# Altium PCB nema17-knockout.PcbDoc (part 3 of 3)
Units mm, origin at the board's own origin, x right, y up, seen from the top; angles counter-clockwise.
Board outline 42.3 x 42.32 mm, 2 copper layers (Top, Bottom), stack 0 mm thick; 130 components, 82 nets, 394 pads, 273 vias.
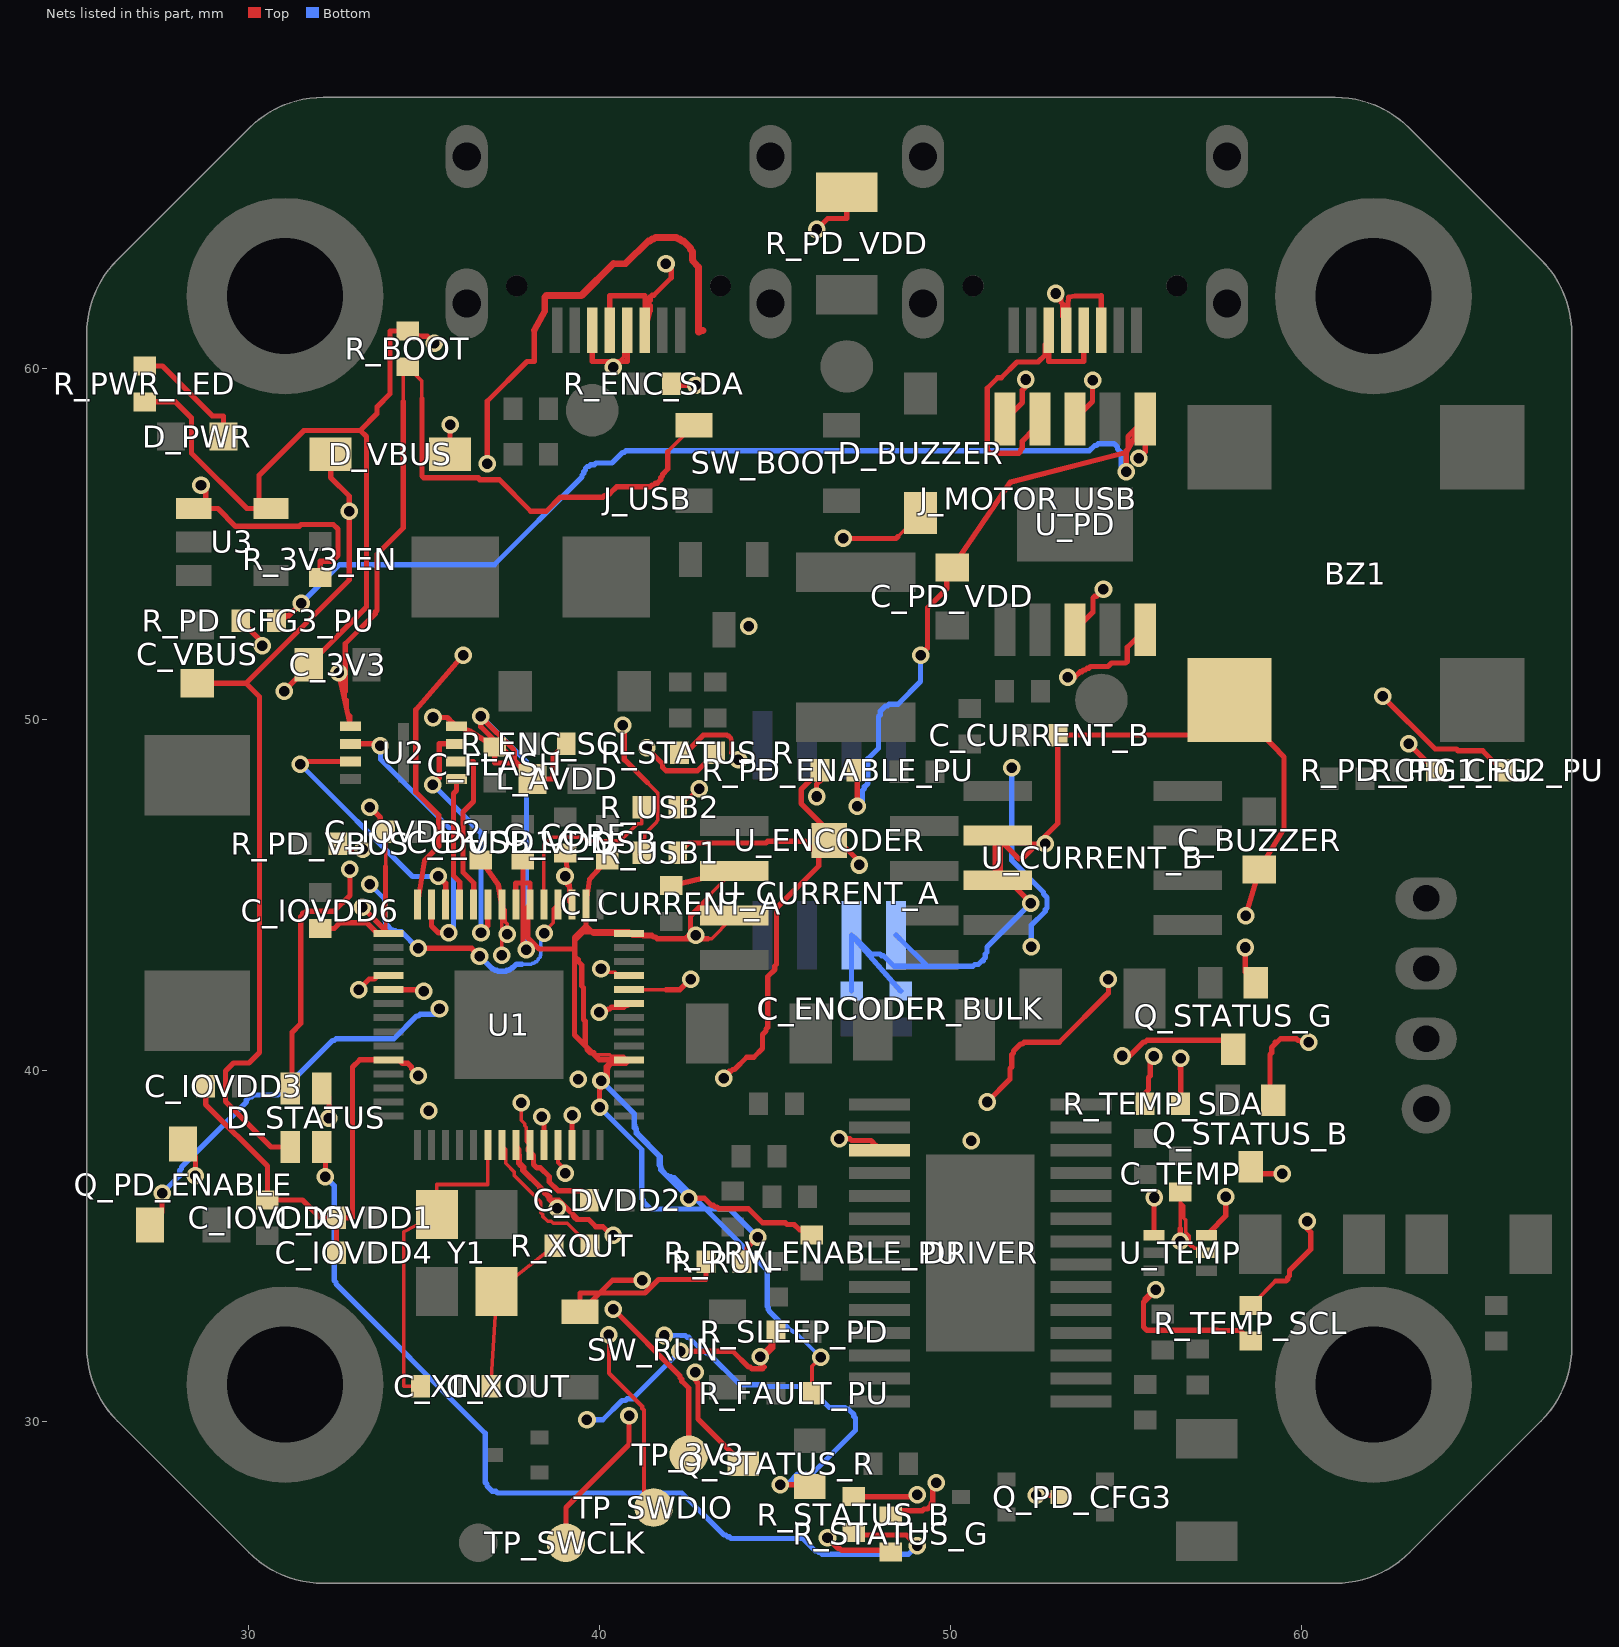
[diagram p3: the nets of this part, all layers, seen from the top]

## Via types
v1: diameter 0.5, hole 0.3, Top to Bottom, 267 vias
v2: diameter 0.45, hole 0.3, Top to Bottom, 6 vias

## Nets (pads, with @x,y where several pads share a name; then routed paths per layer and width w, separated by ;. In a path a pad name is that pad's centre, name@x,y a point inside that pad or via, vN(x,y) a via of type N, cw(c..) or ccw(c..) an arc to the next point about the centre after c; other vN are vias at no path point) (continued)
PD_CFG3_OUTPUT: Q_PD_CFG3.3 R_PD_CFG3_PU.1 U_PD.3 | length 85.6
  Top w0.15: R_PD_CFG3_PU.1@29.79,52.81 29.9,52.71 30.4,52.21 v1(30.4,52.11) ; U_PD.3@53.55,58.56 53.65,58.66 54.05,59.06 54.05,59.41 v1(54.05,59.66) ; Q_PD_CFG3.3@53.05,27.91 Q_PD_CFG3.3@53.1,27.86 Q_PD_CFG3.3@53.05,27.91 ; Q_PD_CFG3.3@53.05,27.91 v1(52.45,27.91) Q_PD_CFG3.3@53.05,27.91
  Mid1 w0.15: v1(35.15,38.86) 37,37.01 37,36.76 37.05,36.71 37.05,36.66 37.2,36.51 37.2,29.31 37.25,29.26 37.25,29.21 37.35,29.11 37.4,29.11 37.45,29.06 37.85,29.06 37.9,29.11 37.95,29.11 38.1,29.26 49.25,29.26 50.5,28.01 50.55,28.01 50.6,27.96 52.4,27.96 v1(52.45,27.91)
  Mid2 w0.135: 52.65,28.06 52.7,28.11 52.8,28.11
  Mid2 w0.15: v1(30.4,52.11) 31.75,50.76 31.75,49.76 31.8,49.71 31.8,49.66 32.45,49.01 32.45,45.56 32.55,45.46 32.55,45.41 32.8,45.16 32.8,44.46 32.85,44.41 32.85,44.36 33.7,43.51 33.7,40.71 33.75,40.66 33.75,40.61 34.4,39.96 34.4,39.66 34.45,39.61 34.45,39.56 v1(35.15,38.86) ; v1(52.45,27.91) 52.6,28.06 52.65,28.06 ; 52.8,28.11 52.85,28.16 52.9,28.16 53,28.26 53,28.36 53.45,28.81 53.7,29.06 53.7,30.56 55.45,32.31 55.45,32.56 58.95,36.06 58.95,36.11 59,36.16 59,42.71 61,44.71 61,44.76 61.05,44.81 61.05,46.61 63.45,49.01 63.45,49.06 63.5,49.11 63.5,49.51 63.45,49.56 63.45,49.61 62.75,50.31 62.75,50.86 62.7,50.91 62.7,50.96 54.35,59.31 54.35,59.36 v1(54.05,59.66)
PD_DM_A: J_MOTOR_USB.9 J_MOTOR_USB.11 U_PD.5 | length 8.2
  Top w0.15: U_PD.5@51.55,58.56 51.65,58.636 52.05,59.036 52.05,59.386 52.1,59.436 52.1,59.486 52.15,59.536 v1(52.15,59.686) ; v1(53,62.136) 53.05,62.086 53.15,61.986 53.15,61.886 53.2,61.836 53.2,61.486 53.3,61.386 J_MOTOR_USB.11@53.3,61.086 53.366,62.034 53.552,62.067 54.3,62.072 J_MOTOR_USB.9@54.3,61.086
  Mid1 w0.15: v1(52.15,59.686) 52.15,61.236 52.35,61.436 52.9,61.986 53,62.086 v1(53,62.136)
PD_DP_A: J_MOTOR_USB.10 J_MOTOR_USB.12 U_PD.4 | length 9.5
  Top w0.15: U_PD.4@52.55,58.56 52.45,58.436 52.4,58.386 52.4,58.286 52.05,57.936 52.05,57.736 52,57.686 52,57.636 51.95,57.586 51.15,57.586 51.05,57.686 51.05,59.436 51.35,59.736 51.45,59.736 51.9,60.186 52.35,60.186 52.5,60.186 52.7,60.386 52.7,60.686 52.8,60.786 J_MOTOR_USB.12@52.8,61.086 52.8,60.2 52.801,60.198 53.8,60.198 J_MOTOR_USB.10@53.8,61.086
PD_ENABLE_GATE: Q_PD_ENABLE.1 R_PD_ENABLE_PU.1 U_PD.10 | length 41.1
  Top w0.15: Q_PD_ENABLE.1@27.2,35.61 27.55,35.96 v1(27.55,36.51) ; v1(46.19,47.81) 46.19,48.16 46.29,48.26 R_PD_ENABLE_PU.1@46.29,48.56 46.2,48.46 45.75,48.01 45.75,47.61 47.45,45.91 v1(47.4,45.86) ; v1(53.34,51.21) 53.54,51.21 53.69,51.36 53.74,51.36 53.79,51.41 53.84,51.41 53.89,51.46 53.94,51.46 53.99,51.51 54.49,51.51 54.59,51.61 54.99,51.61 55.04,51.66 55.04,51.71 55.04,52.06 55.44,52.46 U_PD.10@55.55,52.56
  Mid1 w0.15: v1(35.45,41.76) 37.35,41.76 39.7,44.11 40.2,44.11 40.3,44.01 40.35,44.01 40.4,43.96 41.15,43.96 41.2,43.91 41.65,43.91 43.3,45.56 45.95,45.56 46.25,45.86 v1(47.4,45.86) ; v1(46.19,47.81) 46.39,48.01 46.39,48.06 46.44,48.11 46.44,48.16 46.59,48.31 46.64,48.31 46.69,48.36 46.79,48.36 47.29,48.86 47.34,48.91 50.59,48.91 50.74,49.06 50.79,49.06 50.84,49.11 51.24,49.11 v1(53.34,51.21)
  Bottom w0.15: v1(27.55,36.51) 28.05,37.01 28.05,37.16 28.1,37.21 28.1,37.26 29.95,39.11 29.95,39.16 30.05,39.26 30.1,39.26 30.15,39.31 30.85,39.31 32.4,40.86 32.45,40.86 32.5,40.91 34.15,40.91 34.8,41.56 34.85,41.56 34.9,41.61 35.3,41.61 v1(35.45,41.76)
PD_ENABLE_OUTPUT: DRIVER.17 Q_PD_ENABLE.3 R_SLEEP_PD.1 | length 34.5
  Top w0.15: Q_PD_ENABLE.3@28.15,37.91 28.5,37.56 v1(28.5,37.01) ; v1(42.3,32.01) 43.8,32.01 44.25,31.56 44.3,31.56 44.35,31.51 44.65,31.51 44.7,31.56 44.65,31.61 44.65,31.81 44.95,32.11 44.95,32.46 R_SLEEP_PD.1@45.04,32.56 45.04,32.41 44.89,32.26 44.89,32.16 v1(44.59,31.86) ; v1(46.84,38.06) 47.14,38.06 47.19,38.01 47.74,38.01 47.89,37.86 DRIVER.17@47.984,37.735
  Mid2 w0.15: v1(28.5,37.01) 29.4,36.11 29.4,34.76 29.45,34.71 29.45,34.66 29.6,34.51 29.65,34.51 29.7,34.46 34.6,34.46 34.65,34.41 34.7,34.41 34.75,34.36 35.35,34.36 v1(39.65,30.06) ; v1(44.59,31.86) 44.59,31.61 44.64,31.56 44.64,31.51 44.94,31.21 44.99,31.21 45.04,31.16 45.34,31.16 45.39,31.21 45.44,31.21 45.59,31.36 45.59,31.41 45.64,31.46 45.64,31.81 46.54,32.71 46.89,33.06 47.04,33.06 47.24,33.26 47.24,36.46 47.24,36.91 47.19,36.96 47.19,37.71 v1(46.84,38.06)
  Bottom w0.15: v1(39.65,30.06) 40.1,30.06 40.65,30.61 40.75,30.61 40.8,30.66 40.95,30.66 v1(42.3,32.01)
PD_VBUS_INPUT: R_PD_VBUS.2 U_PD.8 | length 26.4
  Top w0.15: R_PD_VBUS.2@32.56,46.46 32.71,46.46 32.86,46.31 v1(33.26,46.31) ; U_PD.8@53.55,52.56 53.66,52.66 54.06,53.06 54.06,53.41 54.06,53.46 54.11,53.51 54.16,53.51 v1(54.36,53.71)
  Mid1 w0.15: v1(44.26,52.66) 44.46,52.66 45.41,53.61 45.46,53.61 45.51,53.66 54.31,53.66 v1(54.36,53.71)
  Mid2 w0.15: v1(33.26,46.31) 33.56,46.61 34.46,47.51 38.51,47.51 39.66,48.66 39.71,48.66 39.76,48.71 39.86,48.71 40.36,49.21 40.41,49.21 40.46,49.26 40.51,49.26 40.56,49.31 40.76,49.31 41.01,49.56 41.06,49.56 41.11,49.61 41.16,49.61 41.21,49.66 41.26,49.66 v1(44.26,52.66)
PD_VDD_INPUT: C_PD_VDD.1 R_PD_CFG1_PU.2 R_PD_CFG2_PU.2 R_PD_CFG3_PU.2 R_PD_ENABLE_PU.2 R_PD_VDD.2 U_PD.1 | length 92.3
  Top w0.15: R_PD_CFG3_PU.2@30.81,52.81 30.96,52.81 31.11,52.96 31.16,52.96 v1(31.51,53.31) ; v1(46.194,63.958) 46.509,64.273 47.05,64.273 R_PD_VDD.2@47.05,65.023 ; R_PD_ENABLE_PU.2@47.31,48.56 47.35,48.435 47.35,47.585 v1(47.35,47.535) ; v1(49.15,51.835) 49.35,52.035 49.35,53.185 49.6,53.435 49.9,53.735 49.9,54.035 50.05,54.185 C_PD_VDD.1@50.05,54.335 51.7,56.76 55,57.61 U_PD.1@55.55,58.56 ; v1(55.37,57.443) 55.55,57.623 U_PD.1@55.55,58.56 ; v1(62.31,50.66) 63.81,49.16 64.41,49.16 64.46,49.11 65.16,49.11 65.71,48.56 R_PD_CFG2_PU.2@65.81,48.56 ; v1(63.06,49.31) R_PD_CFG1_PU.2@63.81,48.56 ; v1(55.01,57.06) 55.01,57.66 ; v1(55.01,57.06) 55.01,57.66 ; v1(55.01,57.06) 55.01,57.66 ; 55.01,57.66 55.06,57.71 ; 55.01,57.66 55.06,57.71 ; 55.01,57.66 55.06,57.71 ; 55.06,57.71 55.06,58.06 ; 55.06,57.71 55.06,58.06 ; 55.06,57.71 55.06,58.06 ; 55.06,58.06 U_PD.1@55.46,58.46 ; 55.06,58.06 U_PD.1@55.46,58.46 ; 55.06,58.06 U_PD.1@55.46,58.46 ; U_PD.1@55.46,58.46 U_PD.1@55.55,58.56 ; U_PD.1@55.46,58.46 U_PD.1@55.55,58.56 ; U_PD.1@55.46,58.46 U_PD.1@55.55,58.56
  Mid2 w0.15: v1(46.194,63.958) 46.194,62.941 53.531,55.604 v1(55.37,57.443) ; v1(62.31,50.66) 62.21,50.76 61.61,50.76 61.56,50.81 ; v1(63.06,49.31) 61.56,50.81 ; 55.26,57.06 61.51,50.81 ; 55.26,57.06 v1(55.01,57.06) 55.26,57.06 ; 55.26,57.06 61.51,50.81 ; 61.51,50.81 61.56,50.81 ; 61.51,50.81 61.56,50.81
  Bottom w0.15: v1(31.51,53.31) 32.61,54.41 37.01,54.41 39.51,56.91 39.51,56.96 39.56,57.01 39.56,57.06 39.61,57.11 39.61,57.16 39.66,57.21 39.71,57.21 39.76,57.26 39.86,57.26 39.91,57.31 40.36,57.31 40.66,57.61 40.71,57.61 40.76,57.66 53.96,57.66 54.11,57.81 54.16,57.81 54.21,57.86 54.66,57.86 54.76,57.76 54.76,57.71 54.86,57.61 54.86,57.21 v1(55.01,57.06) ; v1(47.35,47.535) 47.5,47.685 47.5,47.985 47.55,48.035 47.55,48.085 47.65,48.185 47.65,48.885 47.95,49.185 47.95,49.285 47.95,50.085 48,50.135 48,50.235 48.15,50.385 48.2,50.385 48.25,50.435 48.5,50.435 49.15,51.085 v1(49.15,51.835)
PLED_D: D_PWR.2 R_PWR_LED.2 | length 3.4
  Top w0.15: R_PWR_LED.2@27.05,60.07 27.557,60.07 28.98,58.647 29.299,58.647 D_PWR.2@29.299,58.06
QSPI_SCLK: U1.52 U2.6 | length 4.8
  Top w0.15: U2.6@35.932,48.81 36.419,48.81 36.419,47.668 36.118,47.367 36.118,45.653 36.424,45.347 ; U1.52@36.425,44.735 36.425,45.347
QSPI_SD0: U1.53 U2.5 | length 3.7
  Top w0.15: U2.5@35.932,48.31 35.932,47.983 35.847,47.897 35.847,45.554 36.025,45.376 U1.53@36.025,44.735
QSPI_SD1: U1.55 U2.2 | length 8.3
  Top w0.15: U2.2@32.918,49.31 33.714,49.31 v1(33.768,49.256) ; U1.55@35.225,44.735 35.225,44.123 35.421,43.927 v1(35.71,43.927)
  Bottom w0.15: v1(33.768,49.256) 33.768,48.871 35.847,46.792 35.847,44.063 v1(35.71,43.927)
QSPI_SD2: U1.54 U2.3 | length 7.6
  Top w0.15: v1(31.485,48.729) 31.567,48.81 U2.3@32.918,48.81 ; v1(35.41,45.534) 35.597,45.347 35.625,45.347 U1.54@35.625,44.735
  Bottom w0.15: v1(31.485,48.729) 34.679,45.534 v1(35.41,45.534)
QSPI_SD3: U1.51 U2.7 | length 7.4
  Top w0.15: v1(35.257,48.149) 35.446,48.338 35.446,49.31 U2.7@35.932,49.31 ; v1(36.632,43.93) 36.825,44.123 U1.51@36.825,44.735
  Bottom w0.15: v1(35.257,48.149) 36.632,46.774 v1(36.632,43.93)
QSPI_SS: R_BOOT.1 SW_BOOT.1 U1.56 U2.1 | length 37.1
  Top w0.1: 32.768,50.81 32.768,50.61 32.818,50.56 32.818,50.21 32.918,50.11 U2.1@32.918,49.81 ; 34.418,59.06 34.418,59.91 34.468,59.96 R_BOOT.1@34.55,60.05 34.65,59.935 34.95,59.635 34.95,59.135 ; 41.95,57.635 SW_BOOT.1@42.7,58.385
  Top w0.15: v1(32.575,51.335) U2.1@32.918,49.81 ; 32.768,50.81 32.768,52.16 33.618,53.01 33.618,53.06 33.668,53.11 33.668,54.71 34.418,55.46 34.418,59.06 ; U1.56@34.825,44.735 35.025,45.985 35.425,46.385 35.425,47.285 34.775,47.935 34.775,50.285 v1(36.125,51.835) ; 34.95,59.135 34.95,56.935 35,56.885 36.55,56.885 36.6,56.835 37.15,56.835 38.05,55.935 38.5,55.935 38.9,56.335 40.1,56.335 40.15,56.385 40.2,56.385 40.25,56.435 40.3,56.435 40.5,56.635 41.45,56.635 41.5,56.685 41.55,56.685 41.6,56.735 41.65,56.735 41.75,56.835 41.75,56.885 41.8,56.935 41.8,56.985 41.95,57.135 41.95,57.635
  Mid1 w0.15: v1(32.575,51.335) 35.575,51.435 v1(36.125,51.835)
RUN_R: R_RUN.1 SW_RUN.1 U1.26 | length 13.5
  Top w0.15: U1.26@39.225,37.885 v1(39.225,38.735) ; v1(41.225,34.035) 40.375,34.035 39.575,33.235 SW_RUN.1@39.45,33.135 39.45,33.672 41.304,33.672 41.686,34.053 43.04,34.053 R_RUN.1@43.04,34.56
  Mid2 w0.15: v1(39.225,38.735) 39.225,37.685 39.575,37.335 39.575,35.435 40.575,34.435 40.825,34.435 v1(41.225,34.035)
STATUS_B_GPIO: Q_STATUS_B.2 U1.5 | length 33.1
  Top w0.15: U1.5@34,42.31 34.95,42.31 v1(35,42.26) ; Q_STATUS_B.2@59.2,39.16 59.1,39.26 59.1,40.11 59.1,40.46 59.15,40.51 59.15,40.66 59.25,40.76 59.25,40.81 59.3,40.81 59.4,40.91 59.85,40.91 59.9,40.86 59.95,40.86 60,40.81 v1(60.2,40.81)
  Mid1 w0.15: v1(35,42.26) 35.65,42.26 36.15,42.76 37.9,42.76 38.2,43.06 38.25,43.06 38.25,43.11 38.3,43.11 38.3,43.16 39.5,44.36 39.55,44.36 39.6,44.41 39.8,44.41 41.1,45.71 41.2,45.71 41.25,45.76 43.05,45.76 43.1,45.81 43.15,45.81 43.2,45.86 45.8,45.86 46.05,46.11 46.1,46.11 46.15,46.16 47,46.16 47.1,46.26 47.15,46.26 47.2,46.31 52.05,46.31 52.7,45.66 54.7,45.66 54.75,45.61 54.8,45.61 55.2,45.21 55.95,45.21 56,45.16 56.05,45.16 56.15,45.06 56.15,45.01 56.2,44.96 56.2,44.81 v1(60.2,40.81)
STATUS_B_LED: D_STATUS.3 R_STATUS_B.1 | length 26.7
  Top w0.15: D_STATUS.3@32.1,37.827 32.15,37.777 32.15,37.727 32.2,37.677 v1(32.2,36.977) ; R_STATUS_B.1@47.25,26.85 47.35,26.777 48.75,26.777 v1(49.05,26.477)
  Bottom w0.15: v1(32.2,36.977) 32.45,36.727 32.45,34.027 32.5,33.977 32.5,33.927 36.75,29.677 36.75,28.277 36.8,28.227 36.8,28.177 36.95,28.027 37.05,28.027 37.1,27.977 42.35,27.977 43.55,26.777 43.6,26.777 43.65,26.727 43.7,26.727 43.75,26.677 45.8,26.677 46.15,26.327 46.2,26.327 46.25,26.277 46.3,26.277 46.35,26.227 48.8,26.227 v1(49.05,26.477)
STATUS_B_SINK: Q_STATUS_B.3 R_STATUS_B.2 | length 19.8
  Top w0.15: R_STATUS_B.2@47.25,27.87 48.3,27.87 49,27.87 v1(49.05,27.92) ; Q_STATUS_B.3@58.55,37.26 58.65,37.17 58.75,37.07 v1(59.45,37.07)
  Mid2 w0.15: v1(49.05,27.92) 49.5,27.47 51.4,27.47 51.95,26.92 52,26.92 52.05,26.87 52.45,26.87 52.5,26.92 52.55,26.92 52.65,27.02 52.65,27.07 52.7,27.12 52.7,27.47 52.85,27.62 52.85,27.67 52.9,27.72 52.9,27.77 53.25,28.12 53.25,28.17 53.95,28.87 53.95,28.92 54,28.97 54,29.32 54.05,29.37 54.05,30.47 55.7,32.12 55.7,32.17 55.75,32.22 55.75,32.42 59.2,35.87 59.2,35.92 59.25,35.97 59.25,36.02 59.3,36.07 59.3,36.62 59.3,36.92 v1(59.45,37.07)
STATUS_G_GPIO: Q_STATUS_G.2 U1.4 | length 33.9
  Top w0.15: v1(33.15,42.31) 33.45,42.61 33.6,42.61 33.7,42.71 U1.4@34,42.71 ; v1(51.05,39.11) 51.7,39.76 51.7,40.06 51.75,40.11 51.75,40.46 51.8,40.51 51.8,40.56 52,40.76 52.05,40.76 52.1,40.81 53.1,40.81 54.5,42.21 v1(54.5,42.61) ; v1(58.4,43.51) 58.4,43.46 58.4,42.81 58.6,42.61 Q_STATUS_G.2@58.7,42.51
  Mid1 w0.15: v1(33.15,42.31) 33.75,41.71 34.3,41.16 34.3,40.86 34.35,40.81 34.35,40.76 34.4,40.71 34.4,40.66 34.6,40.46 34.65,40.46 34.7,40.41 38.05,40.41 39.7,42.06 39.75,42.06 39.8,42.11 47.4,42.11 47.6,42.31 47.65,42.31 47.7,42.36 49.3,42.36 51.05,40.61 v1(51.05,39.11)
  Mid2 w0.15: v1(54.5,42.61) 55.7,42.61 56.35,43.26 56.4,43.26 56.45,43.31 58.1,43.31 58.2,43.31 58.35,43.46 v1(58.4,43.51)
STATUS_G_LED: D_STATUS.2 R_STATUS_G.1 | length 22.4
  Top w0.15: D_STATUS.2@32.1,39.494 32.15,39.444 32.15,39.394 32.3,39.244 v1(32.3,38.644) ; v1(46.5,26.694) 46.8,26.394 46.85,26.394 46.9,26.344 48.2,26.344 R_STATUS_G.1@48.3,26.3
  Mid2 w0.15: v1(32.3,38.644) 38.2,32.744 38.2,32.394 40.4,30.194 40.4,29.944 43.6,26.744 43.65,26.744 43.7,26.694 v1(46.5,26.694)
STATUS_G_SINK: Q_STATUS_G.3 R_STATUS_G.2 | length 21.5
  Top w0.15: R_STATUS_G.2@48.3,27.32 48.35,27.37 48.4,27.37 48.5,27.47 49.2,27.47 49.25,27.52 49.3,27.52 49.35,27.52 49.45,27.62 49.45,27.67 49.5,27.72 49.5,28.17 v1(49.6,28.27) ; v1(54.9,40.42) 55.1,40.42 55.5,40.82 55.55,40.82 55.6,40.87 57.1,40.87 57.8,40.87 57.95,40.72 Q_STATUS_G.3@58.05,40.61
  Mid2 w0.15: v1(49.6,28.27) 49.6,28.32 49.9,28.62 49.9,32.42 50.15,32.67 50.15,32.72 50.2,32.77 50.2,37.77 50.15,37.82 50.15,38.22 50.2,38.27 50.2,38.32 50.25,38.37 50.3,38.37 50.4,38.47 51.1,38.47 51.45,38.82 51.45,38.92 51.5,38.92 51.5,39.02 51.6,39.12 51.65,39.12 51.7,39.17 51.8,39.17 51.85,39.22 53.7,39.22 v1(54.9,40.42)
STATUS_R_GPIO: Q_STATUS_R.2 U1.37 | length 26.6
  Top w0.15: v1(40,41.66) 40.15,41.66 40.25,41.76 40.3,41.76 40.35,41.81 40.7,41.81 40.75,41.86 40.8,41.86 U1.37@40.85,41.91 ; v1(45.15,28.21) 45.9,28.21 Q_STATUS_R.2@46,28.16
  Mid1 w0.15: v1(39.4,39.76) 38.95,39.76 38.9,39.81 38.55,39.81 38.5,39.76 38.45,39.76 38.25,39.56 37.7,39.56 37.65,39.51 37.55,39.51 37.35,39.31 37.35,39.21 37.3,39.16 37.3,36.86 37.65,36.51 37.65,34.51 39.85,32.31 39.85,32.26 40.05,32.06 40.15,32.06 40.2,32.01 40.25,32.01 40.55,31.71 40.6,31.71 40.7,31.61 41.05,31.61 41.8,32.36 41.8,32.41 v1(41.85,32.46)
  Mid2 w0.15: v1(39.4,39.76) 39.6,39.96 39.6,41.06 39.6,41.26 v1(40,41.66)
  Bottom w0.15: v1(41.85,32.46) 42.45,32.46 42.5,32.41 42.55,32.41 42.95,32.01 43,32.01 43.05,31.96 43.1,31.96 44,31.06 44.65,31.06 44.7,31.01 45.9,31.01 45.95,30.96 46,30.96 46.55,30.41 47,30.41 47.05,30.36 47.1,30.36 47.25,30.21 47.25,30.16 47.3,30.11 47.3,29.76 46.85,29.31 46.05,28.51 45.65,28.51 45.4,28.26 45.2,28.26 v1(45.15,28.21)
STATUS_R_LED: D_STATUS.1 R_STATUS_R.1 | length 19.8
  Top w0.15: D_STATUS.1@31.2,39.494 31.25,39.544 31.25,40.494 31.25,41.094 31.5,41.344 31.5,44.394 31.55,44.444 31.55,44.494 31.6,44.494 31.65,44.544 32.45,44.544 32.9,44.994 v1(32.9,45.744) ; v1(41.35,49.194) 41.8,48.744 41.8,48.644 41.9,48.544 42.5,48.544 42.8,48.544 43.2,48.944 R_STATUS_R.1@43.31,49.06
  Mid2 w0.15: v1(32.9,45.744) 34.95,45.744 35.15,45.944 35.2,45.944 35.25,45.994 37.45,45.994 39.85,48.394 39.9,48.394 39.95,48.444 40.05,48.444 40.55,48.944 40.6,48.944 40.65,48.994 40.7,48.994 40.75,49.044 41.2,49.044 v1(41.35,49.194)
STATUS_R_SINK: Q_STATUS_R.3 R_STATUS_R.2 | length 24.8
  Top w0.125: 43.69,49.535 43.74,49.485 43.74,49.46 43.765,49.435 43.765,49.06
  Top w0.14: 43.64,49.56 43.665,49.535 43.69,49.535
  Top w0.15: R_STATUS_R.2@42.29,49.06 42.365,49.06 42.44,49.135 42.54,49.135 42.965,49.56 43.64,49.56 ; v1(42.74,31.41) 42.74,31.185 42.79,31.135 42.79,31.11 42.815,31.085 42.815,30.335 42.815,30.085 44.04,28.86 Q_STATUS_R.3@44.1,28.81 ; 43.765,49.06 v1(43.965,48.86)
  Mid2 w0.15: v1(42.74,31.41) 42.74,32.16 42.715,32.185 42.715,32.21 42.69,32.235 42.69,32.26 42.665,32.285 42.665,32.31 41.665,33.31 41.665,34.185 41.64,34.21 41.64,34.235 41.615,34.26 41.615,34.285 41.59,34.31 41.59,34.335 41.24,34.685 41.24,41.435 41.265,41.46 41.265,41.535 41.29,41.56 41.29,42.935 41.315,42.96 41.315,43.035 41.34,43.06 41.34,43.085 41.39,43.135 41.39,43.16 43.965,45.735 43.965,47.96 v1(43.965,48.86)
SWCLK: TP_SWCLK.1 U1.24 | length 14.7
  Top w0.15: v1(38.365,38.684) 38.425,38.623 U1.24@38.425,37.885 ; TP_SWCLK.1@39.05,26.56 39.05,27.56 40.848,29.358 v1(40.848,30.175)
  Mid2 w0.15: v1(38.365,38.684) 38.347,38.666 38.347,35.537 38.493,35.39 38.493,32.529 v1(40.848,30.175)
SWD: TP_SWDIO.1 U1.25 | length 11.5
  Top w0.119: U1.25@38.825,37.885 38.825,37.385 38.925,37.285 38.925,37.185 v1(39.025,37.085) ; v1(40.275,32.485) 40.275,31.385 41.225,30.435 41.225,30.385 41.275,30.335 41.275,27.835 41.425,27.685 TP_SWDIO.1@41.55,27.56
  Mid1 w0.119: v1(39.025,37.085) 39.025,36.485 39.175,36.335 39.175,36.285 39.225,36.235 39.225,33.535 v1(40.275,32.485)
TEMP_SCL: R_TEMP_SCL.1 U1.39 U_TEMP.1 | length 37.3
  Top w0.1: v1(40.05,42.91) 40.15,42.81 40.45,42.81 40.55,42.71 U1.39@40.85,42.71 ; 57.6,32.61 58.25,32.61 58.45,32.41 R_TEMP_SCL.1@58.55,32.3
  Top w0.15: U_TEMP.1@55.8,35.31 55.8,35.4 v1(55.8,36.39) ; 57.6,32.61 55.6,32.61 55.5,32.71 55.5,33.41 55.55,33.46 55.55,33.51 55.8,33.76 v1(55.85,33.76) 55.8,33.7 55.5,33.4 55.5,33.35 55.5,32.7 55.6,32.6 56.55,32.6 58.25,32.6 R_TEMP_SCL.1@58.55,32.3
  Mid1 w0.1: v1(40.05,42.91) 41,42.91 41.4,43.31 41.7,43.31
  Mid1 w0.15: 41.7,43.31 47.55,43.31 48.2,42.66 49.4,42.66 49.45,42.61 49.5,42.61 51.3,40.81 51.3,40.76 51.35,40.71 51.35,39.51 51.5,39.36 51.5,38.91 51.45,38.91 51.45,38.81 51.35,38.71 51.3,38.71 v1(50.6,38.01) ; v1(55.8,36.39) 55.85,36.35 55.85,33.8 v1(55.85,33.76)
  Mid2 w0.15: v1(50.6,38.01) 51.5,37.11 51.5,36.36 51.55,36.31 51.55,36.26 51.7,36.11 51.75,36.11 51.8,36.06 52.25,36.06 54.5,33.81 54.5,33.56 54.55,33.51 54.55,33.46 54.7,33.31 54.8,33.31 54.85,33.26 55.35,33.26 v1(55.85,33.76)
TEMP_SDA: R_TEMP_SDA.1 U1.38 U_TEMP.6 | length 31.1
  Top w0.1: U1.38@40.85,42.31 41.9,42.31 ; U_TEMP.6@57.3,35.31 57.4,35.41 57.85,35.86 57.85,36.11
  Top w0.15: 41.9,42.31 42.3,42.31 v1(42.6,42.61) ; R_TEMP_SDA.1@55.54,39.06 55.54,39.36 55.64,39.46 55.64,39.81 55.69,39.86 55.69,40.06 55.69,40.31 v1(55.79,40.41) ; U_TEMP.6@57.3,35.31 57.39,35.41 57.84,35.86 57.84,36.11 v1(57.84,36.41) 57.85,36.36 57.85,36.11
  Mid1 w0.15: v1(55.79,40.41) 56.49,39.71 56.49,39.46 57.39,38.56 57.39,38.51 57.44,38.46 57.44,37.16 57.64,36.96 57.64,36.91 57.69,36.86 57.69,36.56 v1(57.84,36.41)
  Mid2 w0.15: v1(42.6,42.61) 43,43.01 48.25,43.01 48.5,43.26 50.5,43.26 50.55,43.31 50.6,43.31 50.65,43.36 50.7,43.36 51.15,43.81 51.9,43.81 52.05,43.96 52.1,43.96 52.15,44.01 52.45,44.01 52.5,43.96 52.55,43.96 52.75,43.76 52.75,43.51 53.95,42.31 53.95,42.26 54,42.21 54,42.11 54.05,42.06 54.05,41.91 57.4,38.56 57.4,38.51 57.45,38.46 57.45,37.16 57.65,36.96 57.65,36.91 57.7,36.86 57.7,36.56 57.8,36.46 v1(57.84,36.41)
USB_DN: R_USB1.2 U1.46 | length 22.4
  Top w0.1: v1(38.438,43.922) 38.44,43.935 38.44,43.96 38.69,44.21 38.69,44.61 38.765,44.685 U1.46@38.825,44.735 ; R_USB1.2@41.215,46.21 41.215,46.36 41.265,46.41 41.265,46.585 41.29,46.61 41.29,46.735 41.64,47.085 41.64,47.11 41.665,47.135 41.665,47.91 41.365,48.21
  Top w0.15: v1(34.84,43.485) 36.365,43.485 v1(36.59,43.26) ; v1(40.665,49.835) 40.715,49.785 40.715,48.86 41.365,48.21
  Mid1 w0.15: v1(33.465,45.31) 38.09,49.935 38.09,50.01 38.115,50.035 38.115,50.135 38.14,50.16 38.14,50.185 38.19,50.235 38.19,50.26 38.265,50.335 38.29,50.335 38.315,50.36 38.34,50.36 38.365,50.385 38.415,50.385 38.44,50.41 38.665,50.41 38.69,50.385 38.74,50.385 38.765,50.36 38.79,50.36 38.84,50.31 38.865,50.31 39.065,50.11 39.065,49.91 39.09,49.885 39.09,49.86 39.115,49.835 39.115,49.81 39.165,49.76 39.165,49.735 39.29,49.61 40.44,49.61 v1(40.665,49.835)
  Bottom w0.1: 37.79,43.035 38.065,43.035 38.09,43.06 38.14,43.06 38.19,43.11 38.215,43.11 38.265,43.16 38.265,43.185 38.315,43.235 38.315,43.285 38.34,43.31 38.34,43.81 38.415,43.885 v1(38.438,43.922)
  Bottom w0.15: v1(33.465,45.31) 33.89,44.885 33.89,44.285 33.915,44.26 33.915,44.21 33.94,44.185 33.94,44.16 34.09,44.01 34.115,44.01 34.14,43.985 34.19,43.985 34.215,43.96 34.365,43.96 v1(34.84,43.485) ; v1(36.59,43.26) 36.94,42.91 36.965,42.91 36.99,42.885 37.015,42.885 37.04,42.86 37.09,42.86 37.115,42.835 37.34,42.835 37.365,42.86 37.415,42.86 37.44,42.885 37.465,42.885 37.515,42.935 37.54,42.935 37.64,43.035 37.79,43.035
USB_DN_JOIN: J_USB.21 J_USB.23 R_USB1.1 | length 51.6
  Top w0.15: J_USB.23@40.3,61.086 40.3,62.072 41.3,62.072 J_USB.21@41.3,61.086 ; J_USB.21@41.3,61.085 41.45,61.635 41.45,61.785 41.4,61.835 41.4,61.885 41.45,61.935 41.45,62.035 41.5,62.085 41.55,62.085 42.05,62.585 42.05,62.835 v1(41.9,62.985) ; R_USB1.1@42.235,46.21 42.35,46.285 42.55,46.485 44.75,46.485 44.8,46.535 45.85,46.535 46.25,46.135 46.25,45.835 45.05,44.635 45.05,43.035 45,42.985 45,42.885 44.8,42.685 44.8,41.235 44.75,41.185 44.75,41.135 44.65,41.035 44.65,40.635 44.4,40.385 44.2,40.385 43.85,40.035 43.8,40.035 43.75,39.985 43.7,39.985 43.55,39.835 v1(43.55,39.785)
  Mid2 w0.15: v1(41.9,62.985) 41.9,62.835 45.65,58.685 45.65,58.635 45.7,58.585 45.7,58.185 46.95,56.935 46.95,56.885 47,56.835 47,56.785 47.05,56.735 47.05,56.135 47.65,55.535 47.65,55.485 47.7,55.435 47.7,55.335 47.75,55.285 47.75,52.585 48.9,51.435 48.95,51.435 v1(51.75,48.635) ; v1(43.55,39.785) 46.15,42.385 47.95,42.385 48,42.435 48.1,42.435 48.65,42.985 50.65,42.985 50.7,43.035 50.75,43.035 50.8,43.085 50.85,43.085 51.3,43.535 v1(52.3,43.535)
  Bottom w0.15: v1(51.75,48.635) 51.75,45.985 52.65,45.085 52.65,45.035 52.75,44.935 52.75,44.635 52.7,44.585 52.7,44.535 52.3,44.135 v1(52.3,43.535)
USB_DP: R_USB2.2 U1.47 | length 5.3
  Top w0.1: U1.47@38.425,44.735 38.425,46.428 38.643,46.646 39.537,46.646 39.63,46.553 40.607,46.553 41.082,47.028 41.215,47.028 R_USB2.2@41.215,47.51
USB_DP_JOIN: J_USB.22 J_USB.24 R_USB2.1 | length 20.3
  Top w0.1: v1@40.45,60.086 40.7,60.336 40.7,60.686 40.8,60.786 J_USB.22@40.8,61.086 ; R_USB2.1@42.235,47.51 42.35,47.586 42.8,48.036 v1(42.85,48.036)
  Top w0.15: J_USB.24@39.8,61.086 39.8,60.198 40.8,60.198 J_USB.22@40.8,61.086 ; v1(40.4,60.036) v1@40.45,60.086
  Mid1 w0.1: 42.4,48.486 v1(42.85,48.036)
  Mid1 w0.15: v1(40.4,60.036) 40.45,59.986 42.9,59.986 42.95,59.936 43,59.936 43.05,59.886 43.1,59.886 43.1,59.836 43.2,59.736 43.2,53.236 42,52.036 42,49.686 42.05,49.636 42.05,48.836 42.4,48.486
V1V1: C_CORE.1 C_DVDD1.1 C_DVDD2.1 U1.23 U1.45 U1.50 | length 17
  Top w0.1: v1(37.225,43.285) U1.50@37.225,44.735 37.275,44.685 37.275,44.635 37.325,44.585 37.325,44.235 37.375,44.185 v1(37.375,43.885) ; v1(37.775,39.085) 37.775,38.585 37.875,38.485 37.875,38.435 37.925,38.385 37.925,37.985 U1.23@38.025,37.885 ; v1(39.025,45.535) 39.025,45.385 39.075,45.335 39.075,45.285 39.125,45.235 39.125,44.835 U1.45@39.225,44.735
  Top w0.15: C_DVDD1.1@36.625,46 37.125,45.3 U1.50@37.225,44.735 ; U1.23@38.025,37.885 38.025,37.835 37.975,37.785 37.975,37.735 38.125,37.585 38.125,37.335 38.225,37.235 38.325,37.235 38.575,36.985 38.575,36.835 38.825,36.585 39.475,36.585 39.625,36.435 C_DVDD2.1@39.715,36.31 ; C_CORE.1@39.025,46.2 U1.45@39.225,44.735
  Mid2 w0.1: v1(37.225,43.285) 37.225,43.135 37.775,42.585 v1(37.775,39.085) ; v1(37.375,43.885) v1(39.025,45.535)
V3V3: BZ1.1 C_3V3.1 C_BUZZER.1 C_CURRENT_A.1 C_CURRENT_B.1 C_ENCODER.1 C_ENCODER_BULK.1 C_FLASH.1 C_IOVDD1.1 C_IOVDD2.1 C_IOVDD3.1 C_IOVDD4.1 C_IOVDD5.1 C_IOVDD6.1 C_TEMP.1 C_USB.1 C_USB_VDD.1 D_BUZZER.1 L_AVDD.1 R_BOOT.2 R_DRV_ENABLE_PU.2 R_ENC_SCL.2 R_ENC_SDA.2 R_FAULT_PU.2 R_PWR_LED.1 R_RUN.2 R_TEMP_SCL.2 R_TEMP_SDA.2 TP_3V3.1 U1.1 U1.10 U1.22 U1.33 U1.42 U1.44 U1.48 U1.49 U2.8 U3.5 U_CURRENT_A.6 U_CURRENT_A.7 U_CURRENT_B.6 U_CURRENT_B.7 U_ENCODER.1 U_ENCODER.2 U_TEMP.5 | length 286.7
  Top w0.1: 33.915,44.86 33.915,44.01 U1.1@34,43.91 ; 33.915,45.81 C_IOVDD2.1@33.915,46.81 ; 37.55,49.16 37.6,49.11 37.6,48.86 38.1,48.36 L_AVDD.1@38.1,48.31 ; 39.85,40.51 39.9,40.46 40.3,40.46 40.35,40.41 40.7,40.41 40.75,40.36 40.8,40.36 U1.33@40.85,40.31 ; 43.1,43.76 43.2,43.76 43.75,44.31 U_CURRENT_A.7@43.845,44.425 ; 43.15,45.01 43.75,45.61 U_CURRENT_A.6@43.845,45.695 ; 48.5,55.21 49.05,55.76 D_BUZZER.1@49.15,55.885 ; U_CURRENT_B.6@51.345,46.695 51.45,46.61 51.6,46.46 U_CURRENT_B.6@52.3,46.46 ; 56.55,35.5 C_TEMP.1@56.55,36.55 56.55,36.25 56.65,36.15 56.65,35.8 56.7,35.75 56.7,35.4 56.8,35.3 56.8,35.05 56.85,35 56.9,35 56.95,34.95 57.15,34.95 57.2,34.9 U_TEMP.5@57.3,34.81 ; 56.55,40.05 56.55,39.15 R_TEMP_SDA.2@56.56,39.06 56.56,40.06 ; R_TEMP_SCL.2@58.55,33.32 58.66,33.41 59.26,34.01 ; U1.42@41.15,43.91 U1.42@40.85,43.91 U1.42@41.15,43.91 ; U1.42@41.15,43.91 U1.42@41.25,43.81 ; U1.42@41.15,43.91 U1.42@41.25,43.81 ; U1.42@41.25,43.81 41.6,43.81 ; U1.42@41.25,43.81 41.6,43.81 ; 41.6,43.81 41.65,43.76 ; 41.6,43.81 41.65,43.76 ; 41.65,43.76 41.85,43.76 41.65,43.76
  Top w0.107: U1.22@37.625,37.885 37.65,37.86 37.65,37.835 37.725,37.76 37.725,37.635 37.75,37.61 37.75,37.385 37.775,37.36 37.775,37.335 37.8,37.31 37.8,37.16 38.35,36.61 38.35,36.585 38.55,36.385 38.55,36.335 v1@38.7,36.185 ; v1(40.01,38.96) 40,38.985 40,39.46 40.25,39.71 40.25,40.085 40.275,40.11 40.275,40.135 40.3,40.16 40.325,40.16 40.35,40.185 40.725,40.185 40.8,40.26 U1.33@40.85,40.31 40.81,40.26 40.735,40.185 40.335,40.185 40.26,40.11 40.26,40.06 40.235,40.035 40.235,39.885 40.085,39.735 v1(40.05,39.72) ; R_FAULT_PU.2@46.06,30.81 46.06,31.585 v1(46.31,31.835)
  Top w0.15: R_PWR_LED.1@27.05,59.05 27.933,59.05 28.388,58.595 28.388,57.586 29.963,56.01 U3.5@30.307,56.01 ; C_IOVDD3.1@28.79,39.56 28.79,39.044 30.55,37.284 C_IOVDD5.1@30.55,36.32 31.548,36.32 32.058,35.81 C_IOVDD1.1@32.515,35.81 ; v1(31.025,50.81) 31.725,51.51 C_3V3.1@31.725,51.56 33.369,53.205 33.369,58.06 33.193,58.237 ; C_IOVDD6.1@32.05,44.05 32.453,44.05 32.621,44.218 33.373,44.218 33.682,43.91 U1.1@34,43.91 33.9,44.01 v1(33.25,44.66) ; C_IOVDD4.1@32.515,34.81 C_IOVDD1.1@32.515,35.81 ; v1(33.465,47.51) 33.765,47.21 33.765,47.11 33.915,46.96 C_IOVDD2.1@33.915,46.81 ; 33.915,44.86 33.915,45.81 ; v1(34.85,39.86) 34.65,40.06 34.65,40.11 34.55,40.21 34.4,40.21 34.3,40.31 U1.10@34,40.31 33.18,40.31 32.972,40.101 32.972,35.81 C_IOVDD1.1@32.515,35.81 ; v1(35.3,60.72) 35.1,60.92 34.85,60.92 34.7,61.07 R_BOOT.2@34.55,61.07 34.043,61.07 34.043,59.281 33.67,58.908 33.67,58.713 33.193,58.237 ; 37.55,49.16 36.65,50.06 v1(36.625,50.1) 36.625,49.8 38.025,48.4 L_AVDD.1@38.1,48.31 ; U1.22@37.625,37.885 37.7,37.76 37.7,37.36 37.75,37.36 37.75,37.31 37.8,37.31 37.8,37.26 37.85,37.26 37.85,37.16 38.3,36.71 38.3,36.66 38.35,36.66 38.35,36.61 38.4,36.61 38.4,36.56 38.45,36.56 38.45,36.51 38.5,36.51 38.5,36.46 38.55,36.46 38.55,36.41 38.6,36.41 38.6,36.36 38.65,36.31 38.85,36.31 39.25,35.91 39.25,35.86 39.3,35.86 39.3,35.81 39.35,35.81 39.35,35.76 39.7,35.76 39.9,35.56 40.1,35.56 40.35,35.31 v1(40.4,35.31) ; U1.49@37.625,44.735 37.625,45.347 38.025,45.347 ; v1(37.925,43.45) 37.825,43.55 C_USB_VDD.1@37.825,46 37.825,45.347 38.025,45.347 ; v1@38.7,36.185 v1(38.8,36.085) ; R_ENC_SCL.2@39.06,49.31 39.05,49.31 38.687,48.947 38.687,48.31 L_AVDD.1@38.1,48.31 ; 39.85,40.51 39.75,40.51 39.65,40.61 39.65,40.66 39.6,40.71 39.6,41.41 39.55,41.46 39.55,42.36 39.5,42.41 39.5,43.01 39.4,43.11 39.4,43.16 39.3,43.26 39.3,43.71 39.55,43.96 40.85,43.96 40.95,43.86 41.5,43.86 41.55,43.81 41.6,43.81 41.65,43.76 42.5,43.76 42.6,43.86 v1(42.75,43.86) ; v1(40.01,38.96) 40.01,39.46 40.21,39.66 40.21,40.11 40.31,40.21 40.76,40.21 U1.33@40.85,40.31 ; v1(40.05,39.72) 40.2,39.87 40.2,40.12 40.3,40.22 40.75,40.22 U1.33@40.85,40.31 ; C_USB.1@40.225,46 39.725,45.45 U1.44@39.625,44.735 ; v1(40.4,33.21) 42.3,31.31 42.3,31.26 42.35,31.21 42.35,31.16 42.55,30.96 TP_3V3.1@42.55,29.06 ; C_CURRENT_A.1@42.05,45.27 U_CURRENT_A.6@43.845,45.695 ; R_ENC_SDA.2@42.06,59.56 42.15,59.52 v1(42.75,59.52) ; v1(42.55,36.37) 43,36.37 43.2,36.17 43.25,36.17 43.3,36.12 43.35,36.12 43.4,36.07 44.25,36.07 44.65,35.67 45.3,35.67 45.35,35.62 45.55,35.62 45.7,35.47 45.75,35.47 45.9,35.32 R_DRV_ENABLE_PU.2@46.05,35.32 ; 43.1,43.76 41.85,43.76 42.45,43.76 42.5,43.81 42.55,43.81 42.55,43.86 42.6,43.91 42.6,44.41 43.15,44.96 43.15,45.01 ; R_RUN.2@44.06,34.56 44.06,34.71 44.21,34.86 44.21,34.96 v1(44.51,35.26) ; v1(46.95,55.16) 48.45,55.16 48.5,55.21 ; U_CURRENT_B.6@51.345,46.695 51.345,46.64 51.952,46.033 52.045,46.033 53.06,47.047 C_CURRENT_B.1@53.06,49.56 57.643,49.56 BZ1.1@57.95,50.56 59.5,48.935 59.5,46.885 C_BUZZER.1@58.8,45.735 v1(58.41,44.41) ; U_CURRENT_B.6@52.3,46.46 v1(52.7,46.46) ; v1(56.55,35.15) 56.55,35.5 ; 56.55,40.05 56.55,40.3 v1(56.56,40.36) ; R_TEMP_SDA.2@56.56,39.06 v1(56.56,40.36) ; 56.56,40.06 v1(56.56,40.36) ; 59.26,34.01 59.56,34.01 59.61,34.06 59.61,34.11 59.66,34.16 59.66,34.31 60.26,34.91 60.26,35.41 60.16,35.51 v1(60.16,35.71) ; U3.5@30.307,56.01 U3.5@30.65,56.01 ; U3.5@30.307,56.01 30.307,56.957 ; U3.5@30.307,56.01 U3.5@30.65,56.01 ; U3.5@30.307,56.01 U3.5@30.65,56.01 ; U3.5@30.307,56.01 30.307,56.957 ; 30.307,56.957 31.586,58.237 ; 30.307,56.957 31.586,58.237 ; 31.586,58.237 33.193,58.237 ; 31.586,58.237 33.193,58.237 ; U2.8@35.932,49.81 36.325,49.67 C_FLASH.1@37.025,49.22 37.025,48.763 37.647,48.763 L_AVDD.1@38.1,48.31 ; U2.8@35.932,49.81 35.815,49.91 35.665,50.06 v1(35.265,50.06) 35.675,50.06 35.825,49.91 U2.8@35.932,49.81 ; U1.48@38.025,44.735 U1.48@38.025,45.041 ; U1.48@38.025,44.735 U1.48@38.025,45.041 ; U1.48@38.025,44.735 37.97,44.68 37.97,43.782 38.284,43.467 39.297,43.467 39.297,43.795 ; U1.48@38.025,45.041 38.025,45.347 ; U1.48@38.025,45.041 38.025,45.347 ; 39.297,43.795 39.625,44.123 ; 39.297,43.795 39.625,44.123 ; 39.297,43.795 39.297,41.017 40.003,40.31 U1.33@40.85,40.31 ; 39.625,44.123 39.838,43.91 ; 39.625,44.123 U1.44@39.625,44.735 ; 39.625,44.123 U1.44@39.625,44.735 ; 39.625,44.123 39.838,43.91 ; 39.838,43.91 U1.42@40.85,43.91 39.838,43.91 ; U_CURRENT_B.7@51.495,45.425 U_CURRENT_B.7@51.645,45.275 ; U_CURRENT_B.7@51.495,45.425 U_CURRENT_B.7@51.345,45.425 U_CURRENT_B.7@51.495,45.425 ; U_CURRENT_B.7@51.495,45.425 U_CURRENT_B.7@51.645,45.275 ; U_CURRENT_B.7@51.645,45.275 U_CURRENT_B.7@51.795,45.275 ; U_CURRENT_B.7@51.645,45.275 U_CURRENT_B.7@51.795,45.275 ; U_CURRENT_B.7@51.795,45.275 v1(52.295,44.775) U_CURRENT_B.7@51.795,45.275
  Top w0.3: U_CURRENT_B.7@51.345,45.425 U_CURRENT_B.6@51.345,46.695
  Mid1 w0.1: 55.75,39.75 56.25,39.25 56.25,38.15 ; 56.25,37.55 56.25,36.05 56.55,35.75 56.55,35.55 ; 56.96,39.96 57.31,39.61 57.31,39.11 57.56,38.86
  Mid1 w0.107: v1@38.8,36.285 38.8,36.435 38.775,36.46 38.775,36.71 38.65,36.835 38.65,36.86 38.625,36.885 38.625,36.935 38.6,36.96 38.6,37.46 39.575,38.435 ; 39.725,38.685 39.975,38.935 v1(40.01,38.96)
  Mid1 w0.15: v1(31.025,50.81) 31.775,50.81 32.175,50.41 34.925,50.41 v1(35.265,50.06) ; v1(35.3,60.72) 36.35,59.67 39.35,59.67 39.45,59.57 42.7,59.57 v1(42.75,59.52) ; v1(38.8,36.085) v1@38.8,36.285 ; 39.575,38.435 39.625,38.485 39.625,38.51 39.65,38.535 39.65,38.585 39.675,38.61 39.675,38.635 39.725,38.685 ; v1(40.4,33.21) v1(40.4,35.31) ; 55.75,39.75 55.4,40.1 55.4,40.15 55.35,40.2 55.35,40.65 55.55,40.85 56,40.85 56.05,40.8 56.1,40.8 56.5,40.4 v1(56.56,40.36) 56.96,39.96 ; 56.25,37.55 56.25,38.15 ; v1(56.55,35.15) 56.55,35.55 ; 57.56,38.86 57.61,38.81 57.61,38.76 57.66,38.71 57.66,38.66 57.71,38.61 57.71,38.16 v1(60.16,35.71)
  Mid2 w0.1: 50.45,46.31 52.3,46.31
  Mid2 w0.15: v1(33.25,44.66) 34,43.91 34,40.81 34.85,39.96 v1(34.85,39.86) ; v1(33.465,47.51) 35.265,49.31 v1(35.265,50.06) ; v1(36.625,50.1) 36.65,50.11 37.35,50.11 38.95,51.71 39,51.71 39.05,51.76 39.7,51.76 40.4,52.46 40.45,52.46 40.5,52.51 40.55,52.51 40.6,52.56 41.6,52.56 41.75,52.71 41.8,52.71 41.9,52.81 42,52.81 42.05,52.86 42.85,52.86 43.55,53.56 43.6,53.56 43.65,53.61 43.7,53.61 43.75,53.66 43.8,53.66 43.85,53.71 45.1,53.71 45.25,53.86 45.3,53.86 45.35,53.91 45.4,53.91 45.45,53.96 46,53.96 46.05,53.91 46.1,53.91 46.15,53.86 46.2,53.86 46.35,53.71 46.35,53.66 46.4,53.61 46.4,53.51 46.45,53.46 46.45,52.51 46.85,52.11 46.85,52.06 46.9,52.01 46.9,50.41 46.85,50.36 46.85,50.06 46.8,50.01 46.8,49.66 46.75,49.61 46.75,49.31 46.7,49.26 46.7,49.01 45.8,48.11 45.8,48.06 45.75,48.01 45.75,47.61 45.8,47.56 45.8,47.51 45.9,47.41 45.95,47.41 46,47.36 46.6,47.36 47.6,46.36 47.65,46.36 47.7,46.31 50.45,46.31 ; v1(42.75,43.86) 42.75,44.06 44.2,45.51 44.2,45.56 44.25,45.61 44.25,48.46 44.4,48.61 44.4,48.71 44.45,48.76 44.45,48.96 45.55,50.06 45.55,50.11 45.65,50.21 45.65,50.31 46.85,51.51 46.85,51.56 46.9,51.61 46.9,53.61 46.95,53.66 v1(46.95,55.16) ; 52.3,46.31 52.55,46.31 v1(52.7,46.46) ; v1(56.56,40.36) 59.01,43.56 59.01,44.01 v1(58.41,44.41)
  Bottom w0.107: v1(40.05,39.72) 41.01,38.76 41.01,38.485 41.035,38.46 41.035,38.41 41.06,38.385 41.06,38.335 ; 45.36,32.685 45.385,32.685 45.485,32.585 45.51,32.585 45.535,32.56 45.56,32.56 45.585,32.535 45.61,32.535 v1(46.31,31.835)
  Bottom w0.15: v1(36.625,50.1) 37.925,48.8 v1(37.925,43.45) ; v1(40.01,38.96) 41.21,37.76 41.21,36.36 41.26,36.31 41.26,36.26 41.46,36.06 43.71,36.06 v1(44.51,35.26) ; v1(40.05,39.72) 41,38.77 41,38.37 41.05,38.32 41.05,38.22 41.7,37.57 41.7,37.32 41.75,37.27 41.75,37.17 v1(42.55,36.37) ; 41.06,38.335 41.06,38.26 41.085,38.235 41.085,38.21 41.735,37.56 41.735,37.285 41.76,37.26 41.76,37.21 41.785,37.185 41.785,37.16 41.935,37.01 41.96,37.01 41.985,36.985 42.035,36.985 42.06,36.96 42.135,36.96 44.785,34.31 44.785,33.285 44.81,33.26 44.81,33.21 44.835,33.185 44.835,33.16 45.235,32.76 45.26,32.76 45.285,32.735 45.31,32.735 45.36,32.685 ; C_ENCODER.1@47.185,42.27 U_ENCODER.2@47.185,43.855 ; U_ENCODER.1@48.455,43.855 48.545,43.775 49.345,42.975 50.645,42.975 ; C_ENCODER_BULK.1@48.585,42.27 U_ENCODER.2@47.185,43.855 ; U_ENCODER.2@47.185,43.855 47.295,43.775 47.745,43.325 47.995,43.325 48.045,43.275 48.095,43.275 48.395,42.975 50.645,42.975 ; 50.645,42.975 50.695,43.025 ; 50.645,42.975 50.695,43.025 ; 50.695,43.025 50.795,43.025 ; 50.695,43.025 50.795,43.025 ; 50.795,43.025 50.895,43.125 ; 50.795,43.025 50.895,43.125 ; 50.895,43.125 50.945,43.125 ; 50.895,43.125 50.945,43.125 ; 50.945,43.125 50.945,43.175 ; 50.945,43.125 50.945,43.175 ; 50.945,43.175 50.995,43.225 ; 50.945,43.175 50.995,43.225 ; 50.995,43.225 50.995,43.325 ; 50.995,43.225 50.995,43.325 ; 50.995,43.325 51.045,43.375 ; 50.995,43.325 51.045,43.375 ; 51.045,43.375 51.045,43.525 ; 51.045,43.375 51.045,43.525 ; 51.045,43.525 v1(52.295,44.775) 51.045,43.525
VBUS: C_VBUS.1 D_STATUS.4 D_VBUS.2 J_USB.18 J_USB.27 | length 45.3
  Top w0.15: D_STATUS.4@31.2,37.827 30.649,37.827 29.353,39.122 29.353,39.989 29.583,40.219 30.026,40.219 30.326,40.519 30.326,50.651 29.942,51.035 ; v1(32.881,55.938) 32.881,56.367 ; v1(36.81,57.284) 36.81,59.067 37.941,60.198 38.15,60.198 38.15,61.086 ; 29.942,51.035 32.881,53.974 32.881,56.367 ; 29.942,51.035 C_VBUS.1@28.55,51.035 29.942,51.035 ; 32.35,56.898 D_VBUS.2@32.35,57.56 32.35,56.898 ; 32.35,56.898 32.881,56.367 ; 32.35,56.898 32.881,56.367
  Top w0.185: 38.15,61.086 38.45,61.635 38.45,62.035
  Top w0.19: 40.4,62.985 40.75,62.985 41.4,63.635
  Top w0.2: 38.45,62.035 38.5,62.085 39.5,62.085 40.4,62.985 ; 41.4,63.635 41.45,63.635 41.5,63.685 41.55,63.685 41.6,63.735 42.2,63.735 42.25,63.685 42.3,63.685 42.35,63.635 42.4,63.635 42.6,63.435 42.6,63.385 42.65,63.335 42.65,63.085 42.825,62.885 42.825,61.035 42.95,61.086
  Mid1 w0.15: v1(32.881,55.938) 35.464,55.938 v1(36.81,57.284)
VSYS: D_VBUS.1 R_3V3_EN.1 U3.1 | length 21.4
  Top w0.15: U3.1@28.45,56.01 U3.1@28.793,56.01 ; v1(28.658,56.677) 28.793,56.541 U3.1@28.793,56.01 ; D_VBUS.1@35.75,57.56 v1(35.75,58.398) ; U3.1@28.793,56.01 29.137,56.01 ; U3.1@28.793,56.01 29.137,56.01 ; 29.137,56.01 29.641,55.505 ; 29.137,56.01 29.641,55.505 ; 29.641,55.505 31.453,55.505 ; 29.641,55.505 31.453,55.505 ; 31.453,55.505 31.505,55.558 ; 31.453,55.505 31.505,55.558 ; 31.505,55.558 32.423,55.558 ; 31.505,55.558 32.423,55.558 ; 32.05,54.507 R_3V3_EN.1@32.05,54.05 32.05,54.507 ; 32.05,54.507 32.392,54.507 ; 32.05,54.507 32.392,54.507 ; 32.392,54.507 32.557,54.671 ; 32.392,54.507 32.557,54.671 ; 32.423,55.558 32.557,55.424 ; 32.423,55.558 32.557,55.424 ; 32.557,54.671 32.557,55.424 ; 32.557,54.671 32.557,55.424
  Mid1 w0.15: v1(28.658,56.677) 34.028,56.677 v1(35.75,58.398)
XIN: C_XIN.1 U1.20 Y1.1 | length 9.4
  Top w0.1: C_XIN.1@34.915,31.01 34.425,31.01 34.425,35.41 Y1.1@35.375,35.91 35.375,36.76 36.825,36.76 U1.20@36.825,37.885
XOUT: R_XOUT.2 U1.21 | length 4.2
  Top w0.1: U1.21@37.225,37.885 37.335,37.76 37.335,37.36 37.585,37.11 37.585,37.01 38.335,36.26 38.335,35.96 38.385,35.91 38.385,35.86 38.535,35.71 38.635,35.71 38.685,35.66 39.085,35.66 R_XOUT.2@39.735,35.01
XOUT_R: C_XOUT.1 R_XOUT.1 Y1.3 | length 4.8
  Top w0.1: C_XOUT.1@36.915,31.01 Y1.3@37.075,33.71 R_XOUT.1@38.715,35.01
pads on no net: BZ1.3 BZ1.4 DRIVER.19 DRIVER.23 DRIVER.27 J_MOTOR_USB.7 J_MOTOR_USB.13 J_MOTOR_USB.NPTH-3 J_MOTOR_USB.NPTH-4 J_USB.19 J_USB.25 J_USB.NPTH-1 J_USB.NPTH-2 SW_BOOT.2 SW_BOOT.4 SW_RUN.2 SW_RUN.3 U1.9 U1.11 U1.12 U1.13 U1.14 U1.15 U1.16 U1.17 U1.18 U1.28 U1.36 U3.4 U_ENCODER.3 U_ENCODER.5 U_TEMP.3

## Polygon pours and split planes (outlines as drawn)
GND on Top (solid): 90 vertices, not listed, extent 40.808,32.026 46.36,35.395
GND on Top (solid): 88 vertices, not listed, extent 55.367,32.875 59.985,36.112
GND on Top (solid): 82 vertices, not listed, extent 54.877,35.66 58,37.835
GND on Top (solid): 51.975,39.816 51.975,39.953 51.979,39.957 51.996,39.989 51.996,39.94 51.996,39.925 51.985,39.89 51.98,39.833 51.975,39.819
GND on Top (solid): 52.025,40.235 52.025,40.353 52.029,40.357 52.054,40.405 52.063,40.434 52.126,40.497 52.155,40.506 52.203,40.531 52.207,40.535 52.346,40.535 52.287,40.517 52.206,40.474 52.135,40.416 52.077,40.345 52.034,40.264
GND on Top (solid): 50 vertices, not listed, extent 56.835,38.655 59.071,41.018
GND on Top (solid): 119 vertices, not listed, extent 52.356,37.858 55.415,42.053
GND on Top (solid): 59 vertices, not listed, extent 40.015,44.035 42.953,45.69
GND on Top (solid): 90 vertices, not listed, extent 36.393,45.432 41.156,49.802
GND on Top (solid): 21 vertices, not listed, extent 42.075,50.669 42.78,51.506
GND on Top (solid): 67 vertices, not listed, extent 51.193,53.51 55.775,57.251
GND on Top (solid): 556 vertices, not listed, extent 29.628,38.124 47.093,59.491
GND on Top (solid): 98 vertices, not listed, extent 37.332,56.21 40.843,60.236
GND on Top (solid): 4373 vertices, not listed, extent 25.7,25.7 67.4,67.42
GND on Bottom (solid): 107 vertices, not listed, extent 25.7,25.7 67.4,67.42
GND on Bottom (solid): 133 vertices, not listed, extent 39.425,27.885 47.025,31.565
GND on Bottom (solid): 41 vertices, not listed, extent 41.409,33.389 44.51,35.79
GND on Bottom (solid): 220 vertices, not listed, extent 55.986,34.19 64.477,37.235
GND on Bottom (solid): 452 vertices, not listed, extent 44.728,29.904 55.097,40.794
GND on Bottom (solid): 48 vertices, not listed, extent 56.56,40.185 59.155,40.81
GND on Bottom (solid): 56.189,40.614 56.164,40.66 56.108,40.728 56.04,40.784 55.992,40.81 56.56,40.81 56.472,40.801 56.388,40.776 56.31,40.734 56.242,40.678
GND on Bottom (solid): 259 vertices, not listed, extent 41.55,35.672 44.69,41.535
GND on Bottom (solid): 143 vertices, not listed, extent 31.911,50.835 44.255,57.375
GND on Mid1 (solid): 40 vertices, not listed, extent 49.3,32.21 52.325,37.41
GND on Mid1 (solid): 24 vertices, not listed, extent 49.3,36.206 50.421,37.41
GND on Mid2 (solid): 20 vertices, not listed, extent 51.589,36.29 52.4,37.41
GND on Mid2 (solid): 33 vertices, not listed, extent 50.175,32.21 52.4,37.41
GND on Mid2 (solid): 49.625,32.21 49.3,32.21 49.3,37.41 49.925,37.41 49.925,32.877 49.921,32.873 49.896,32.825 49.887,32.796 49.706,32.614 49.671,32.573 49.646,32.525 49.63,32.474 49.625,32.42

## Silkscreen, mask and mechanical layers (free items; w line width, h text height)
Top Overlay:
  text "RP2040 NEMA17" at 46.55,66.56 h0.8
  text "DATA" at 32.82,65.91 h1.8
  text "PWR" at 60.65,65.91 h1.8
  text "USB-C" at 37.425,65.81 h0.9
  text "VMOTOR" at 47.05,61.16 h0.65
  text "PD" at 39.8,59.91 h0.65
  text "PWR" at 31.925,55.81 h0.8
  text "BOOT" at 49.425,54.81 h0.8
  text "GND" at 54.3,51.66 h0.65
  text "RUN" at 39.425,30.31 h0.8
Bottom Overlay:
  drawing of 209 lines, arcs and shapes, not listed
  text "not FCC approved for resale" at 26.5,47.56 h0.85 r270
  text "For evaluation only;" at 27.6,47.56 h0.85 r270
  text "Made with tscircuit" at 60.05,46.86 h0.9

## Text inside footprints (layer, text, board x,y; h text height)
BZ1: Top Overlay "+" at 60.55,51.66 h2.03 r90
D_MOTOR_TVS: Mech1 "+" at 40.6,54.06 h0.58 r180; Mech1 "-" at 35.5,54.06 h0.58 r180
D_PWR: Mech1 "+" at 27.688,58.06 h0.2; Mech1 "-" at 29.412,58.06 h0.2
D_VBUS: Mech1 "+" at 35.775,57.56 h0.24 r180; Mech1 "-" at 32.325,57.56 h0.24 r180
J1: Top Overlay "1" at 64.55,37.91 h0.5 r90; Top Overlay "JST PH" at 59.95,41.91 h0.5 r90
Q_PD_CFG1: Top Overlay "CFG1" at 35.15,29.06 h0.7
Q_PD_CFG2: Top Overlay "CFG2" at 50.95,26.36 h0.7
Q_PD_CFG3: Top Overlay "CFG3" at 53.75,26.36 h0.7
SW_BOOT: Mech1 "MARKED INTERNALLY CONNECTED" at 44.8,58.505 h0.12; Mech1 "MARKED INTERNALLY CONNECTED" at 44.8,56.355 h0.12
SW_RUN: Mech1 "MARKED INTERNALLY CONNECTED" at 41.55,33.255 h0.12; Mech1 "MARKED INTERNALLY CONNECTED" at 41.55,31.105 h0.12
Y1: Mech1 "MARKED INTERNALLY CONNECTED" at 36.13,34.883 h0.12 r52.31